# EAGLE board mk-keypad (EAGLE 4.16)
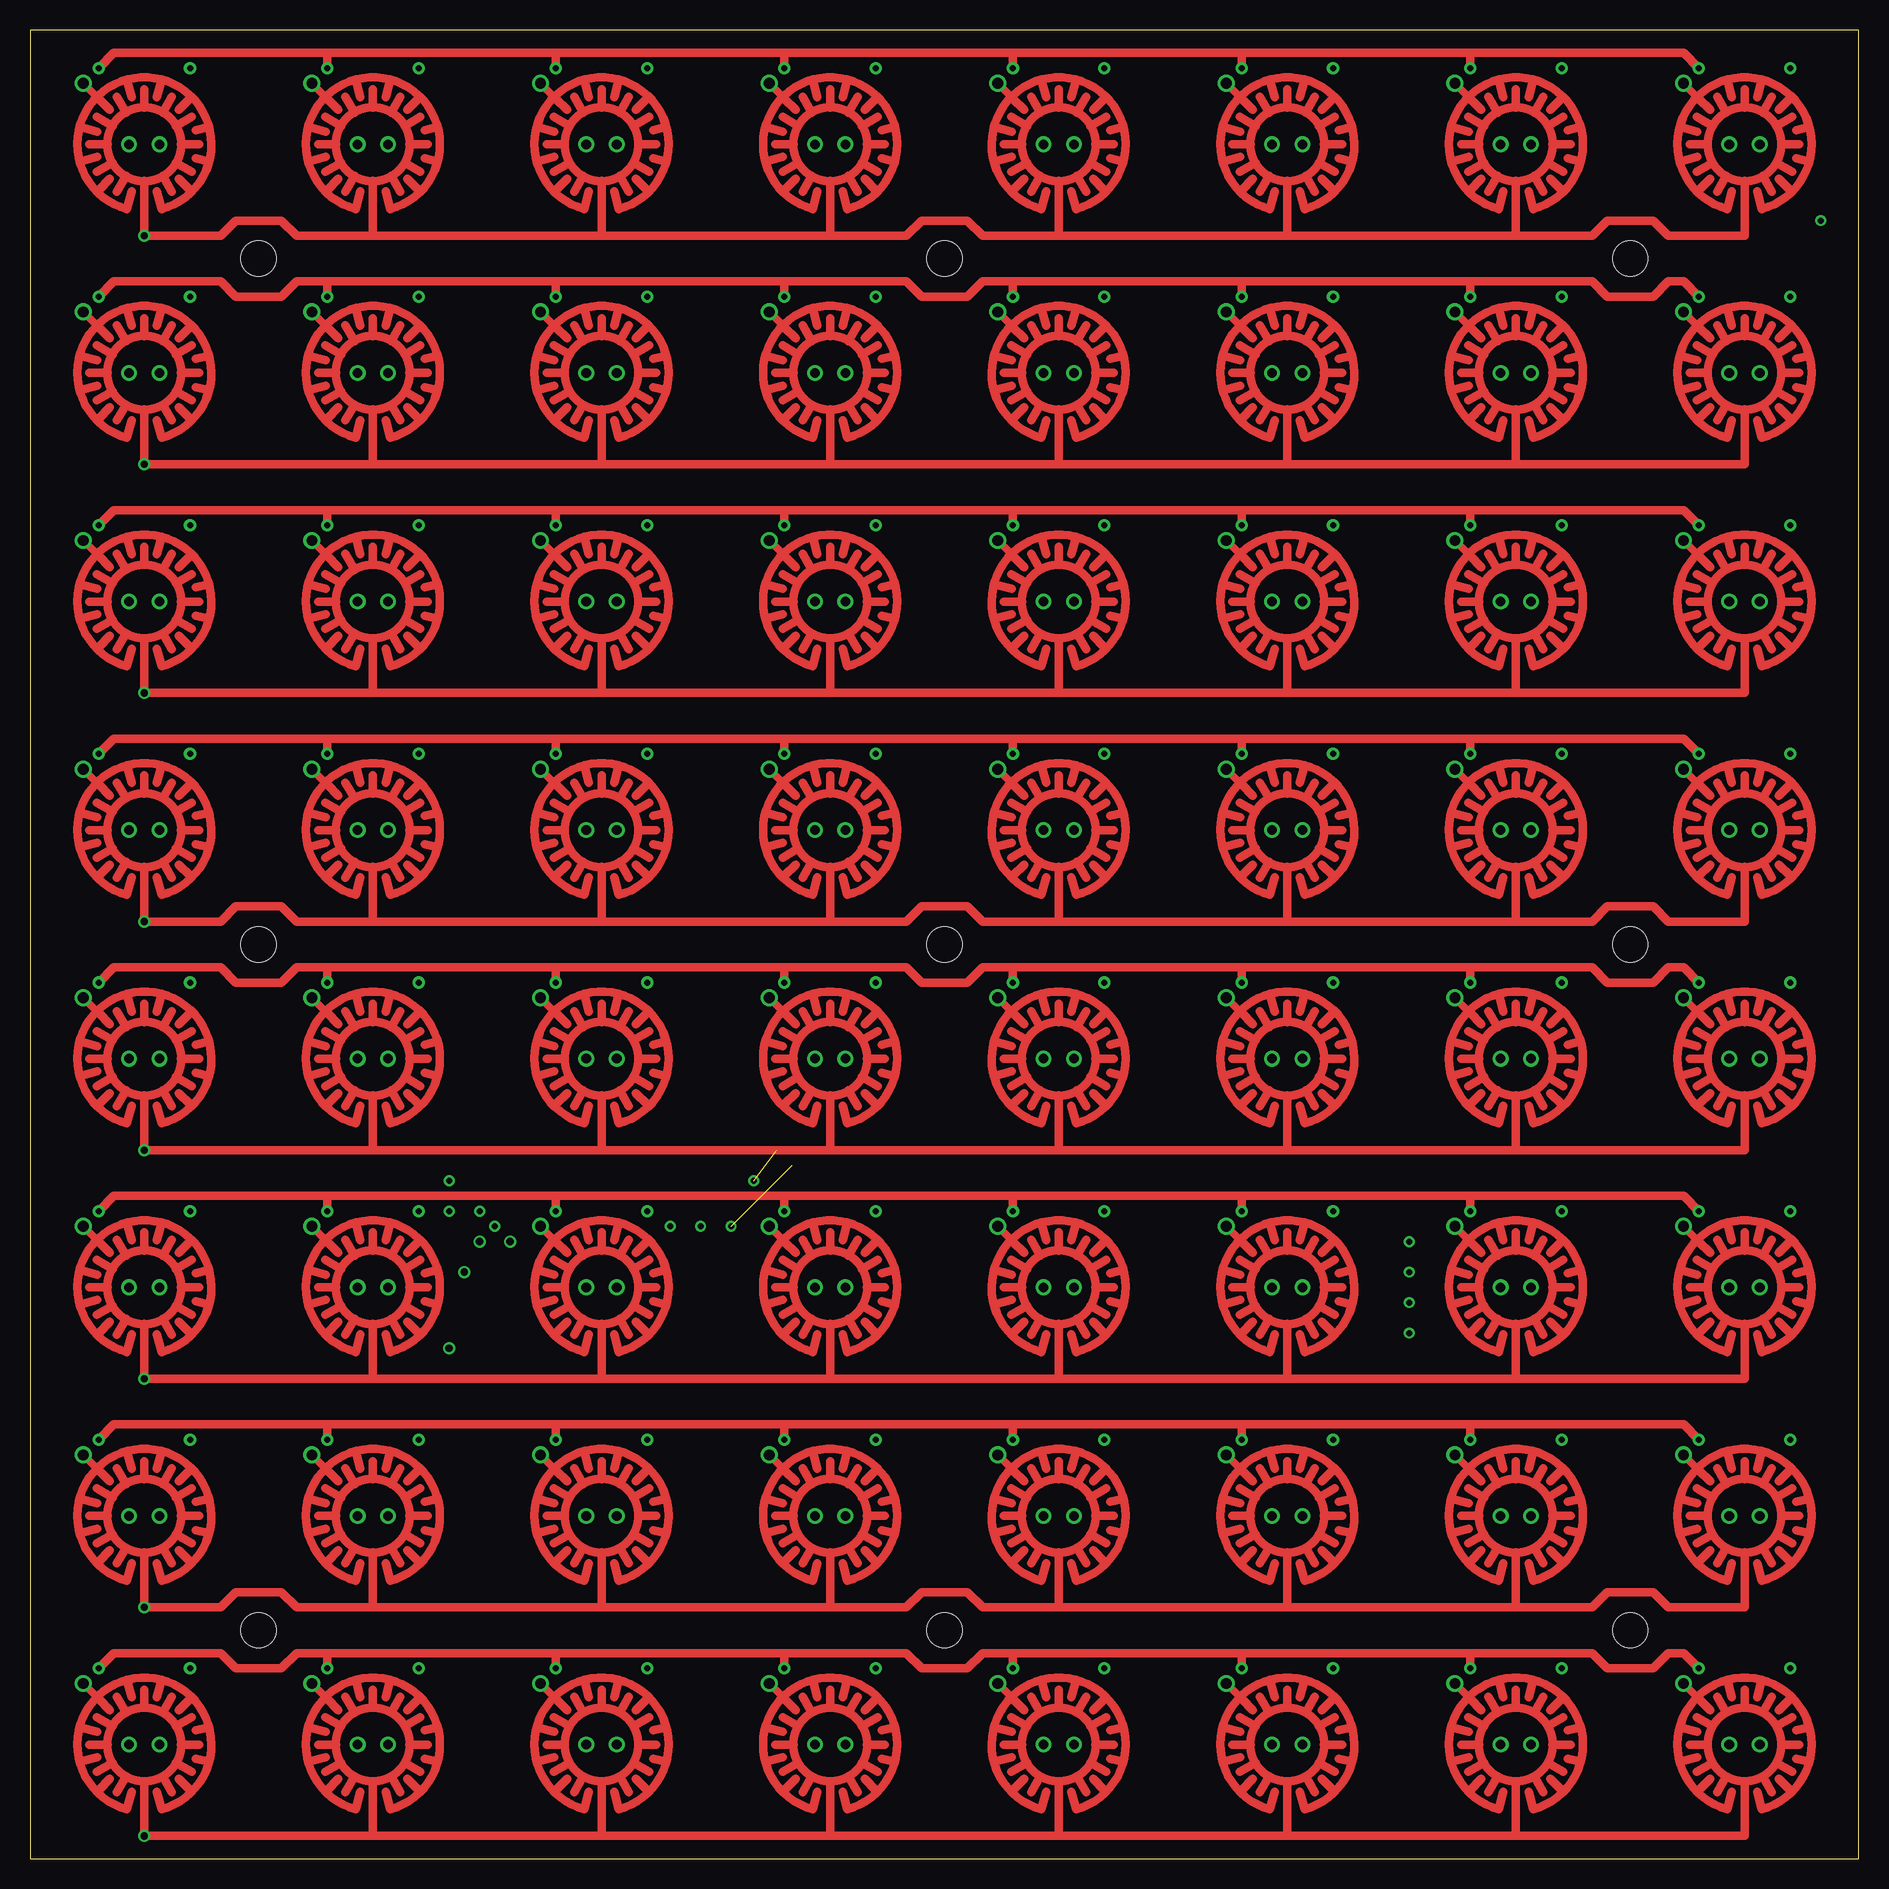
[diagram p0: board, top side]
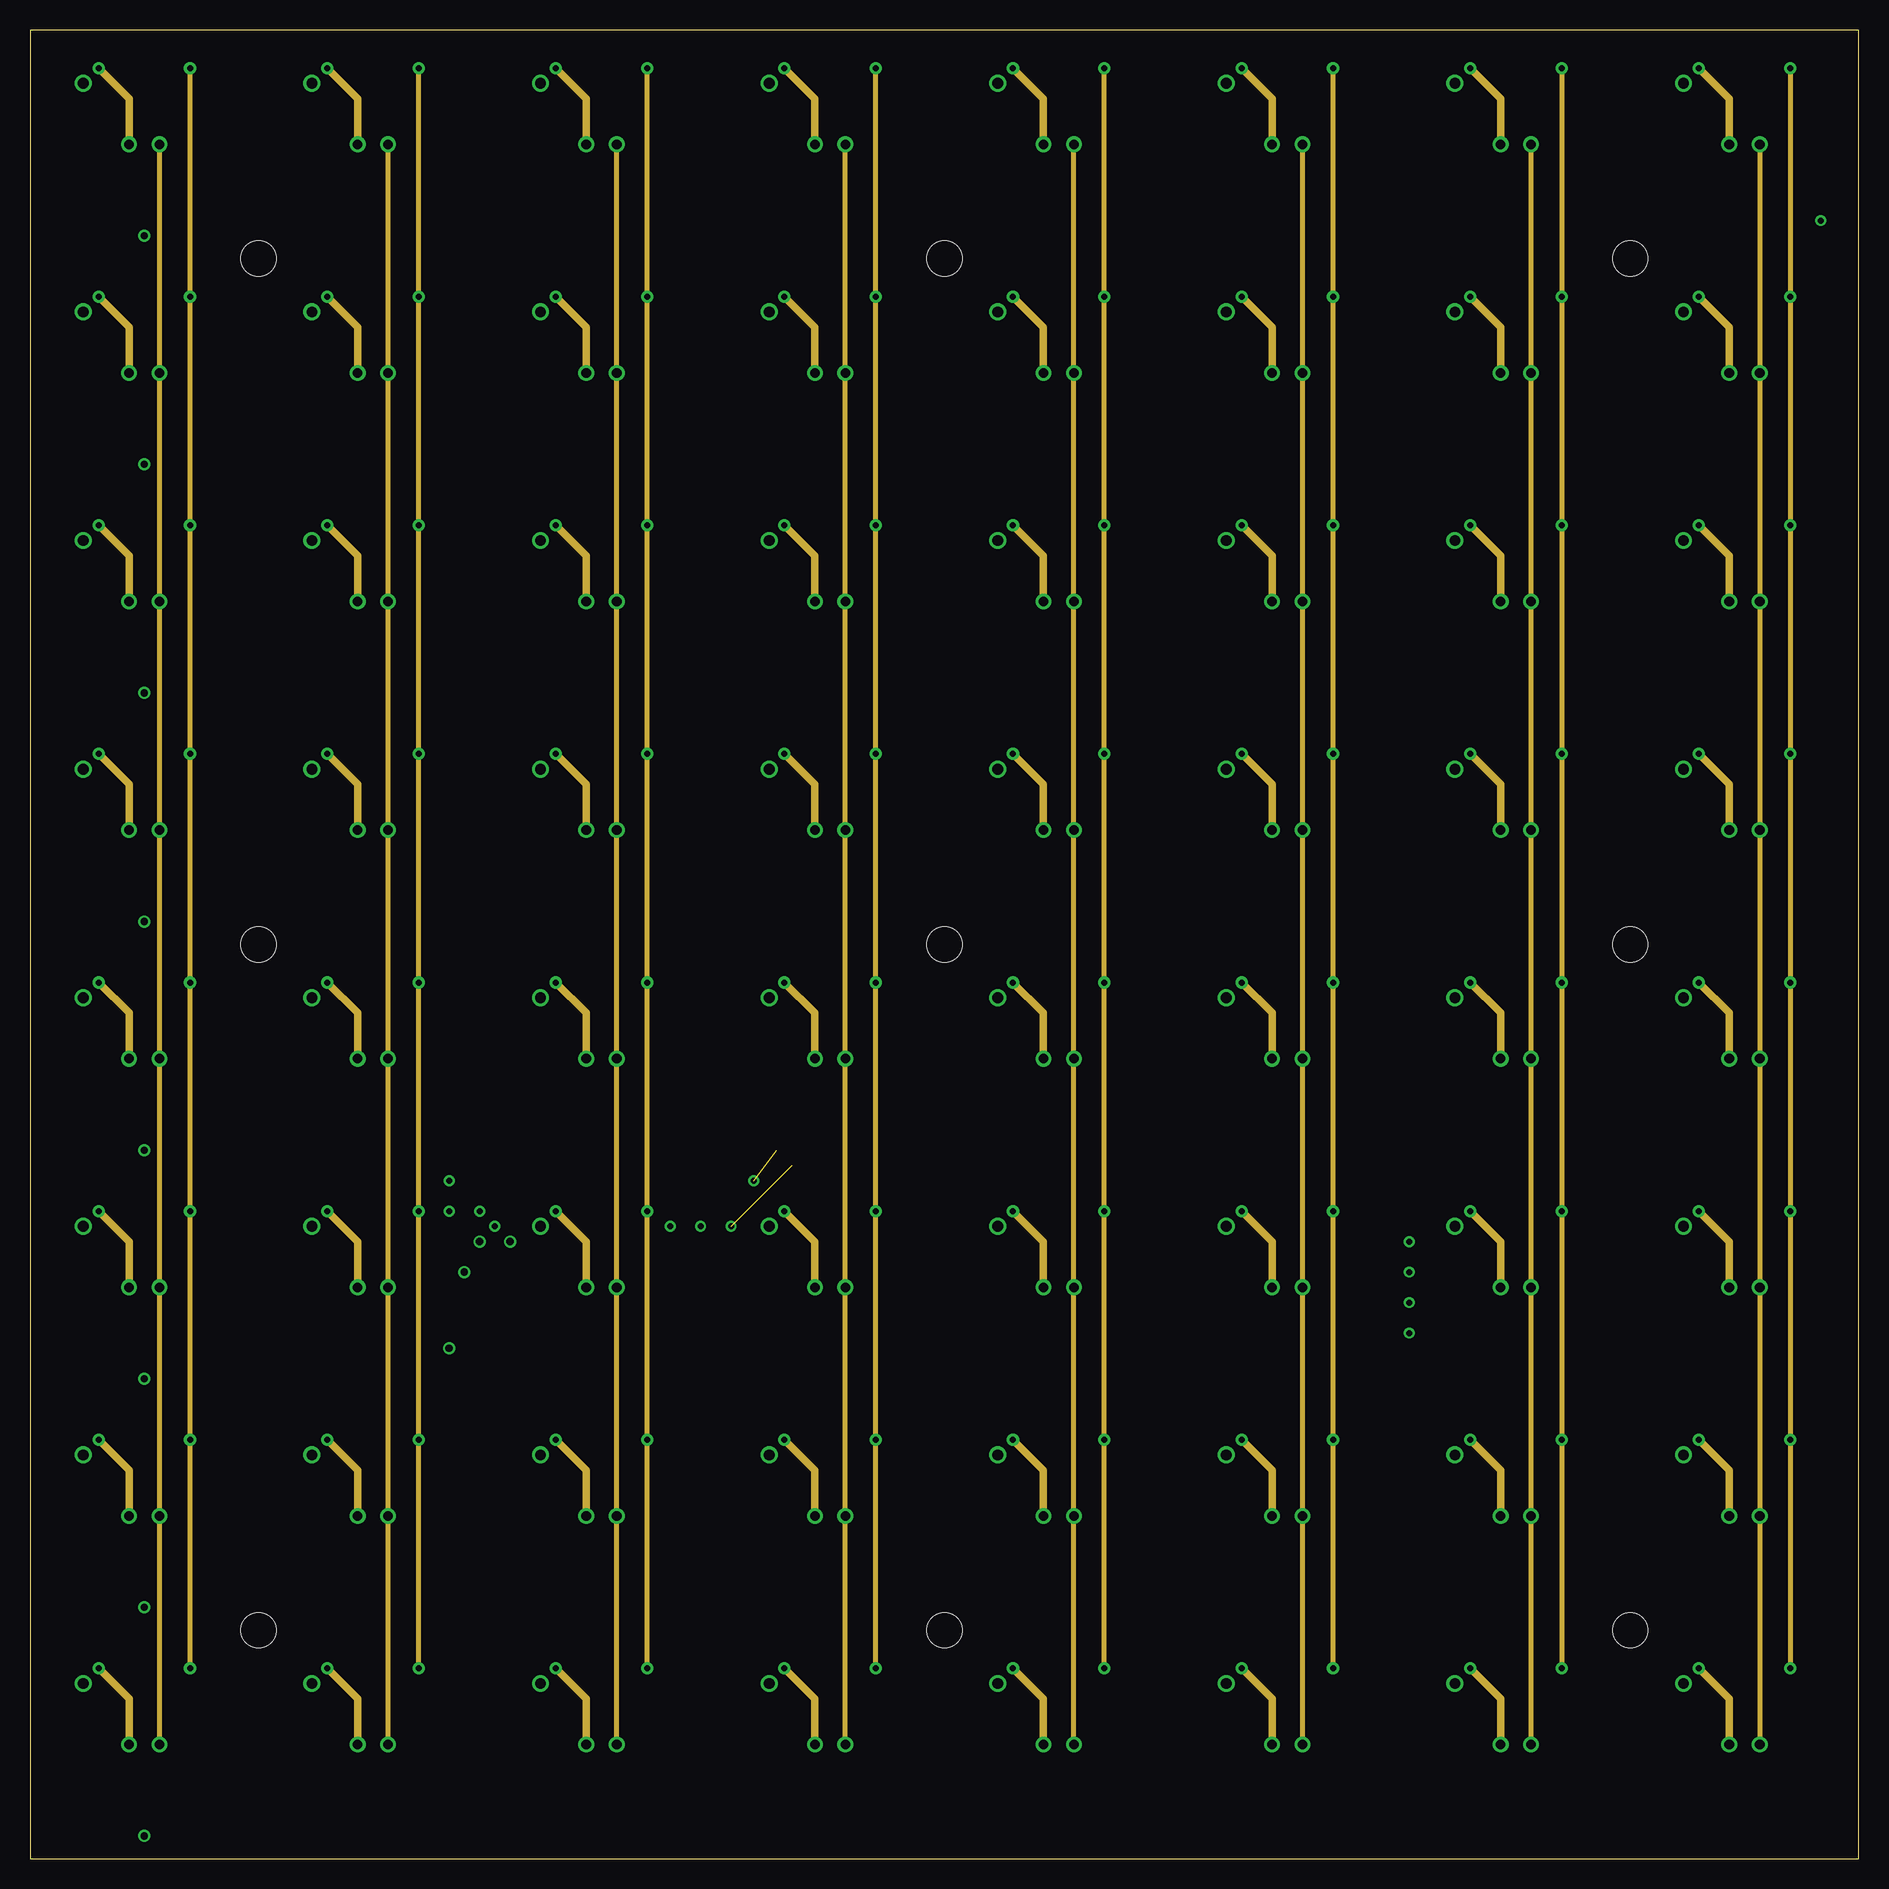
[diagram p1: board, inner layer Route2]
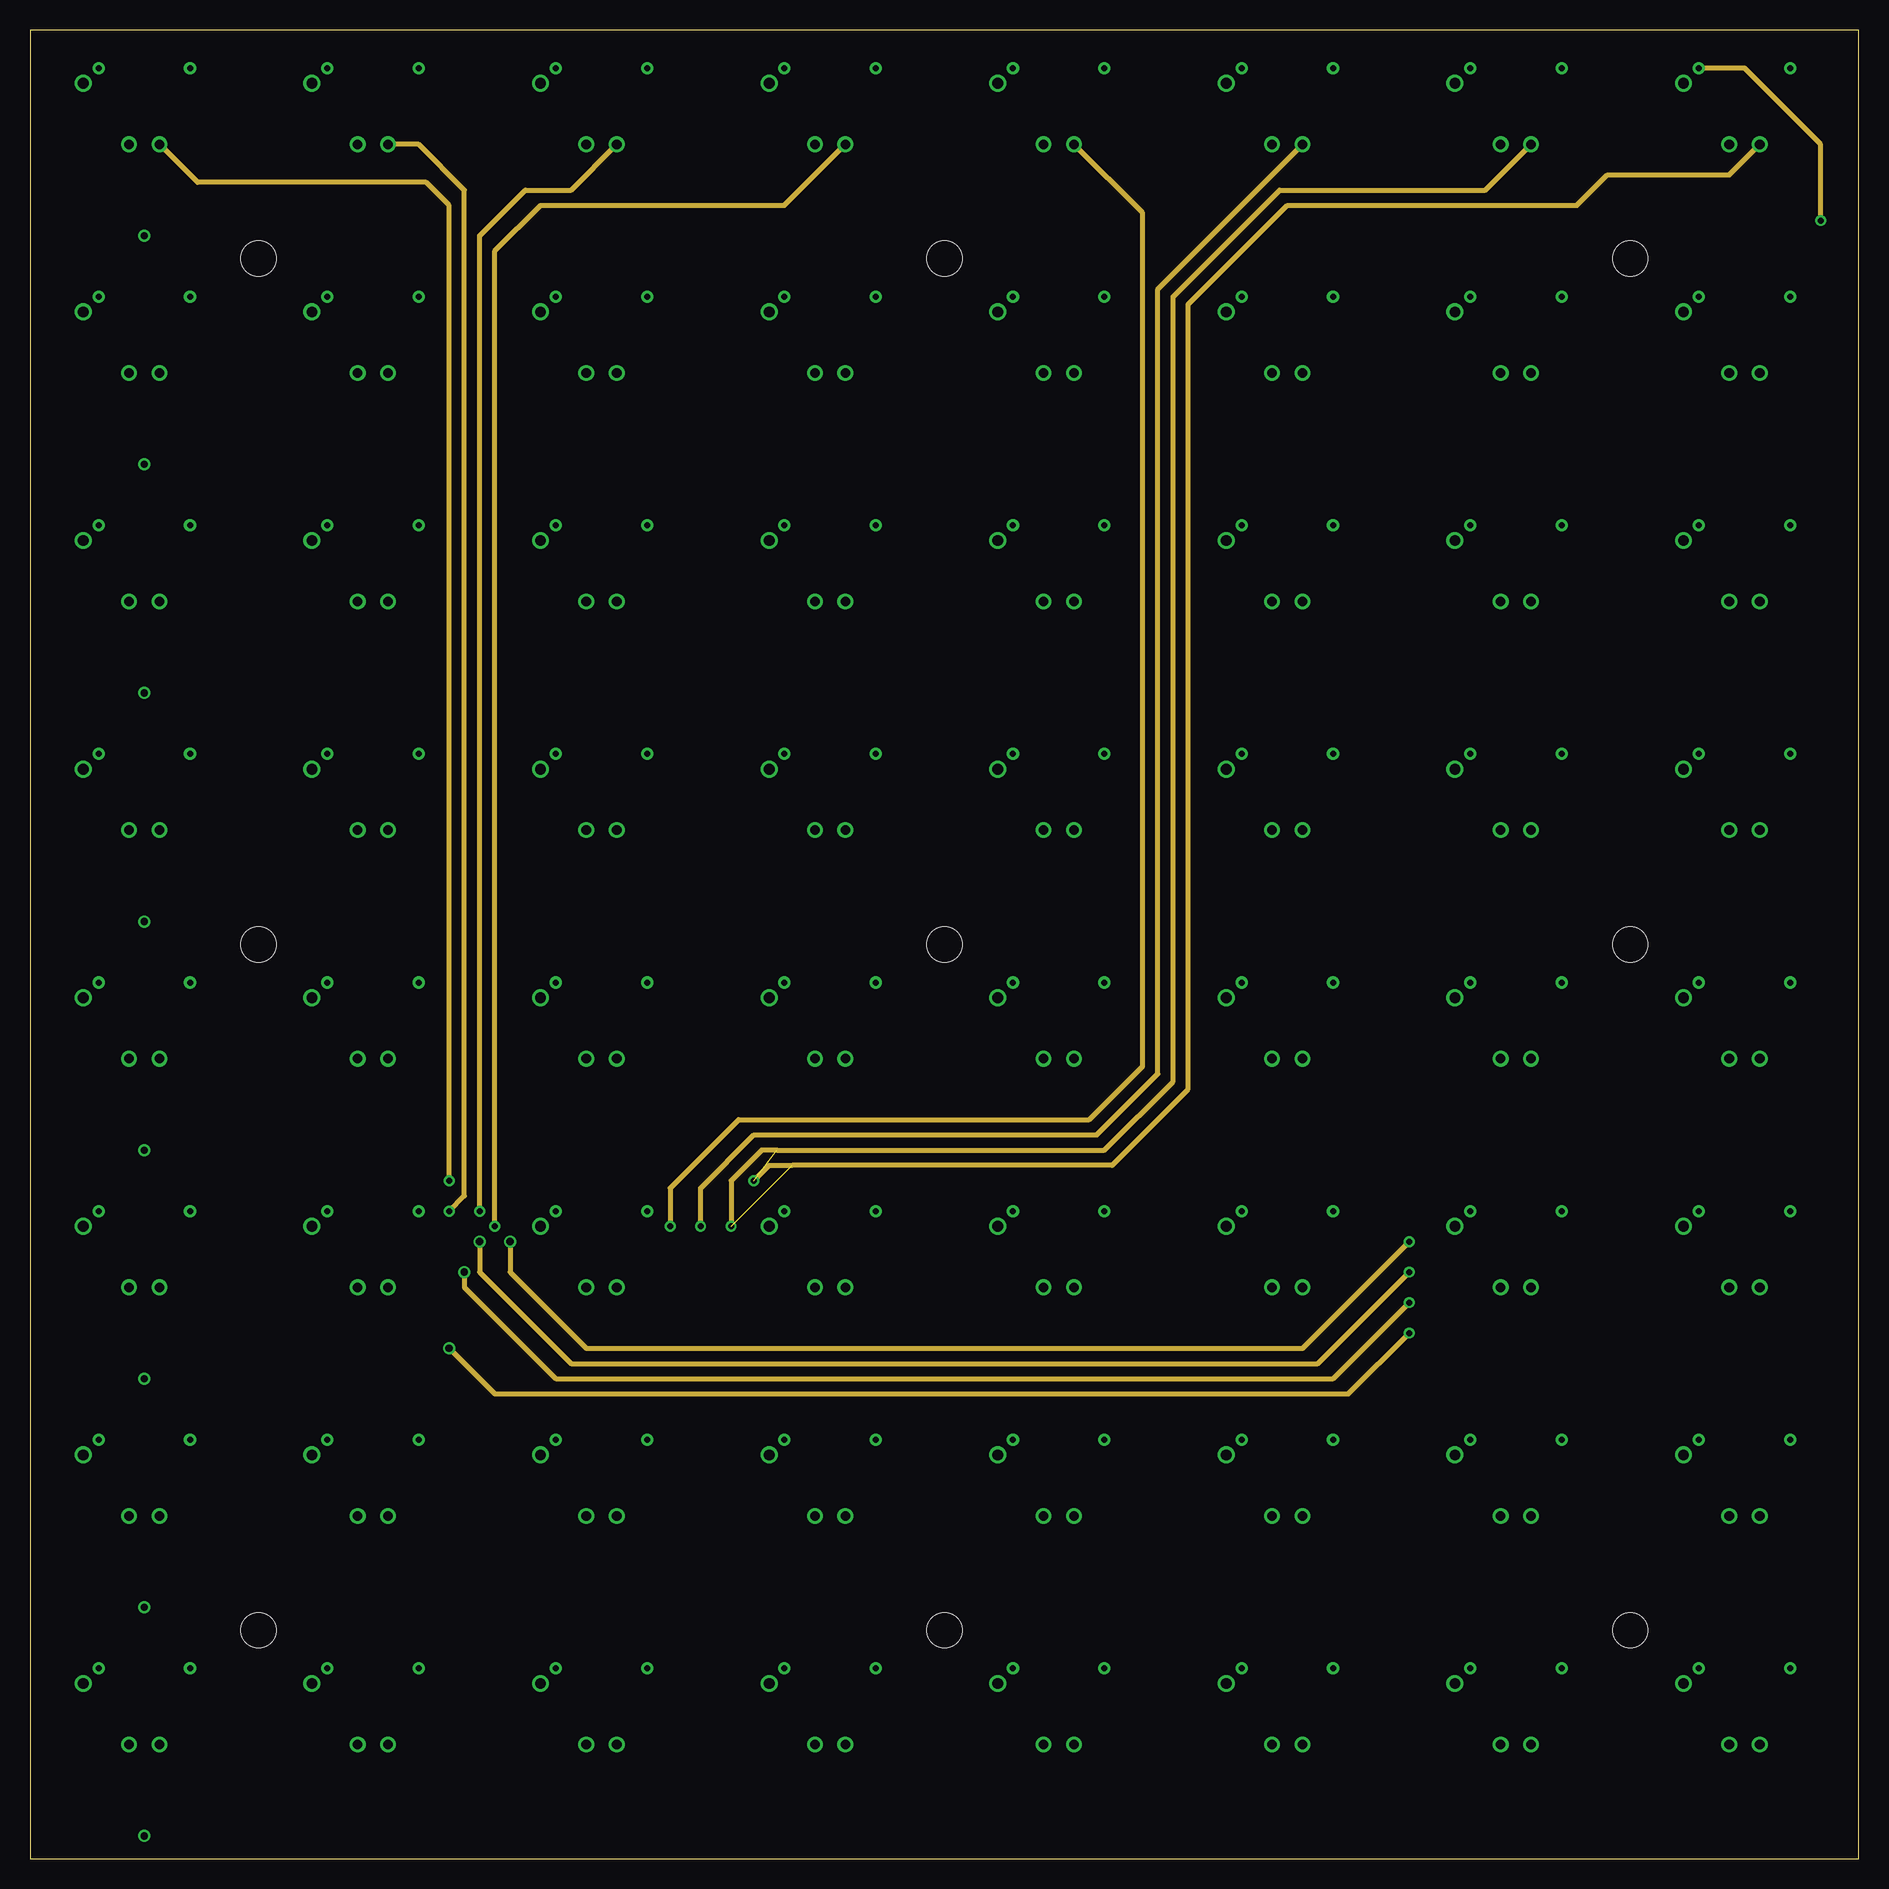
[diagram p2: board, inner layer Route3]
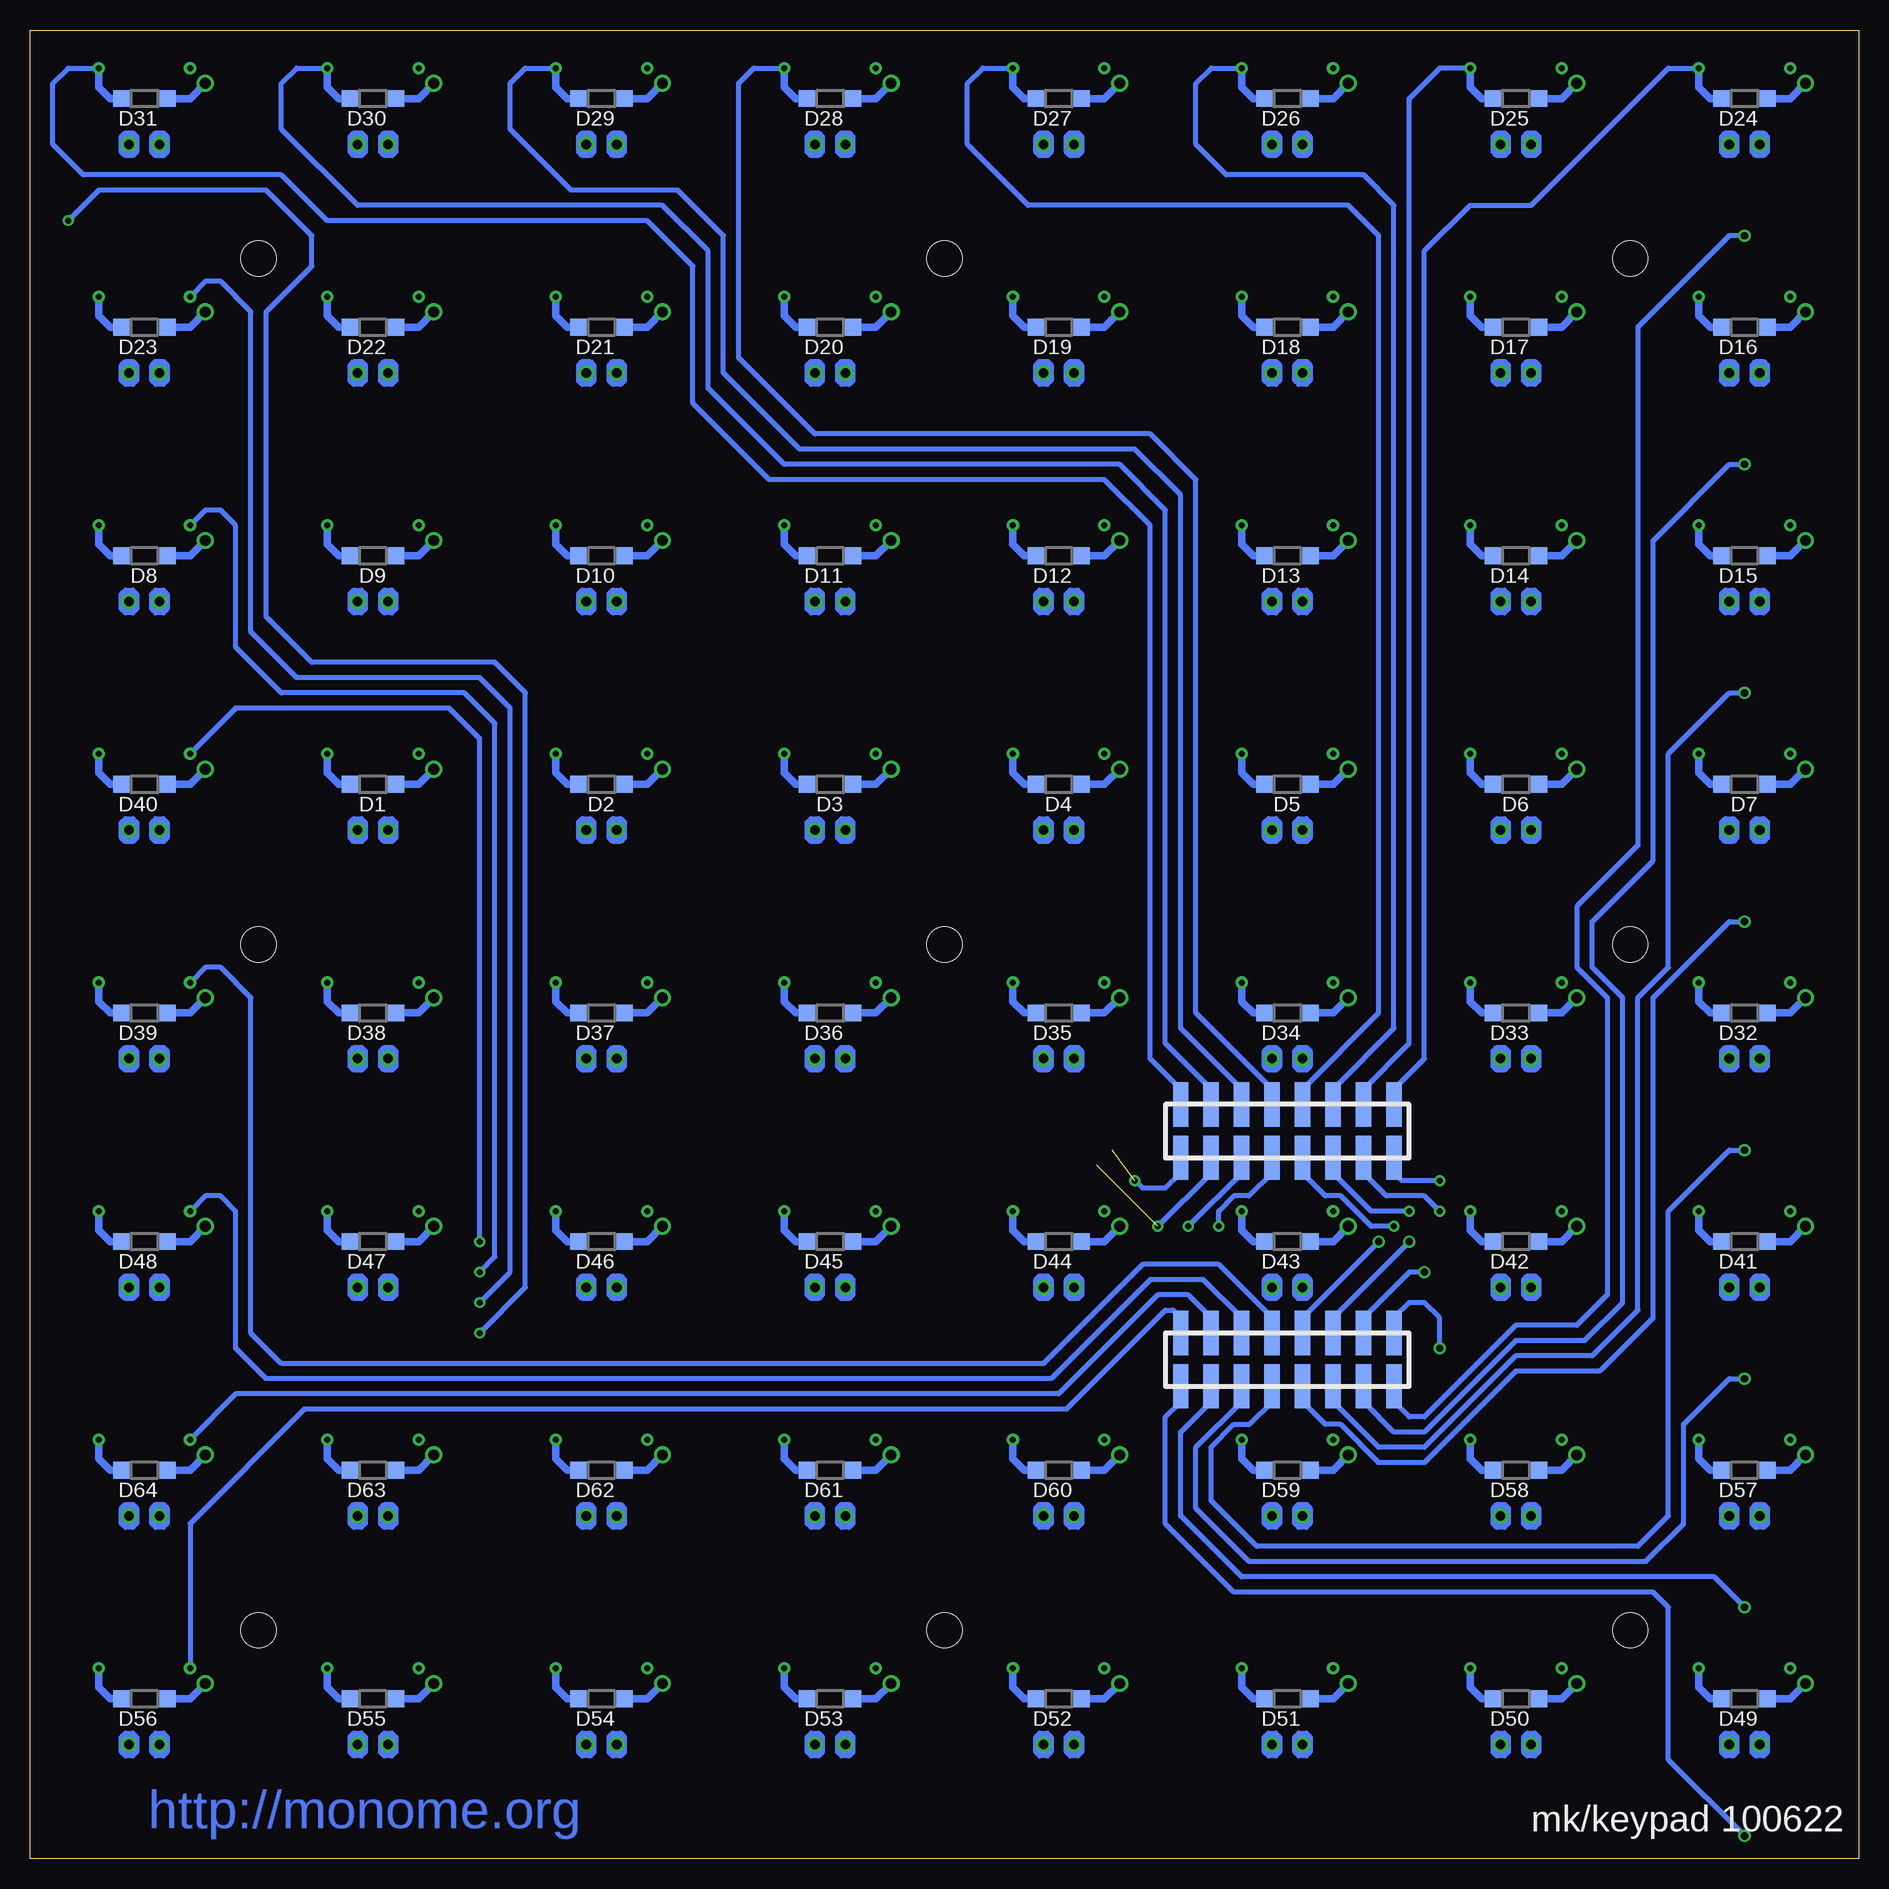
[diagram p3: board, bottom side, seen from below]

Size 152.4 x 152.4 mm. Coordinates in mm from the lower left corner, seen from the top.
Outline: 0,0 152.4,0 152.4,152.4 0,152.4 0,0
Copper layers (1*2*3*16): Top 0.035mm / dielectric 1.5mm / Route2 0.035mm / dielectric 0.15mm / Route3 0.035mm / dielectric 0.2mm / Bottom 0.035mm
Design rules "default": minimum track width 10mil, minimum drill 24mil, track to track 8mil, track to pad 8mil, pad to pad 8mil, via to via 8mil, smd to smd 8mil, copper to edge 40mil, drill to drill 8mil, minimum pad ring 10mil, minimum via ring 8mil, stop-mask expansion 4mil, vias tented up to drill 0mil, thermal gap 10mil
Holes 2.92 mm at 19.05,19.05 76.2,19.05 76.2,76.2 19.05,76.2 133.35,76.2 133.35,19.05 19.05,133.35 76.2,133.35 133.35,133.35

## Footprints (pad centres in the part's own frame; a part is rotated, then mirrored left to right if it is on the bottom)
SOD123 = smd 1.4 x 1.4: A 1.9,0; C -1.9,0
MPAD4 = drill 0.9 round: P$1 -5.08,5.08 | drill 0.5 round: P$2 -3.81,6.35; P$3 3.81,6.35 | drill 0.8 pad 1.016 round: P$4 1.27,0; P$5 -1.27,0
8X2SMD = smd 1.27 x 3.683: P$1 0,0; P$2 2.54,0; P$3 5.08,0; P$4 7.62,0; P$5 10.16,0; P$6 12.7,0; P$7 15.24,0; P$8 17.78,0; P$9 17.78,-4.445; P$10 15.24,-4.445; P$11 12.7,-4.445; P$12 10.16,-4.445; P$13 7.62,-4.445; P$14 5.08,-4.445; P$15 2.54,-4.445; P$16 0,-4.445

## Placement (x,y rotation side)
D1  [SOD123]  123.83,89.54 180 bottom
D2  [SOD123]  104.78,89.54 180 bottom
D3  [SOD123]  85.73,89.54 180 bottom
D4  [SOD123]  66.67,89.54 180 bottom
D5  [SOD123]  47.62,89.54 180 bottom
D6  [SOD123]  28.58,89.54 180 bottom
D7  [SOD123]  9.53,89.54 180 bottom
D8  [SOD123]  142.88,108.59 180 bottom
D9  [SOD123]  123.83,108.59 180 bottom
D10  [SOD123]  104.78,108.59 180 bottom
D11  [SOD123]  85.73,108.59 180 bottom
D12  [SOD123]  66.67,108.59 180 bottom
D13  [SOD123]  47.62,108.59 180 bottom
D14  [SOD123]  28.58,108.59 180 bottom
D15  [SOD123]  9.53,108.59 180 bottom
D16  [SOD123]  9.53,127.64 180 bottom
D17  [SOD123]  28.58,127.64 180 bottom
D18  [SOD123]  47.62,127.64 180 bottom
D19  [SOD123]  66.67,127.64 180 bottom
D20  [SOD123]  85.73,127.64 180 bottom
D21  [SOD123]  104.78,127.64 180 bottom
D22  [SOD123]  123.83,127.64 180 bottom
D23  [SOD123]  142.88,127.64 180 bottom
D24  [SOD123]  9.53,146.69 180 bottom
D25  [SOD123]  28.58,146.69 180 bottom
D26  [SOD123]  47.62,146.69 180 bottom
D27  [SOD123]  66.67,146.69 180 bottom
D28  [SOD123]  85.73,146.69 180 bottom
D29  [SOD123]  104.78,146.69 180 bottom
D30  [SOD123]  123.83,146.69 180 bottom
D31  [SOD123]  142.88,146.69 180 bottom
D32  [SOD123]  9.53,70.48 180 bottom
D33  [SOD123]  28.58,70.48 180 bottom
D34  [SOD123]  47.62,70.48 180 bottom
D35  [SOD123]  66.67,70.48 180 bottom
D36  [SOD123]  85.73,70.48 180 bottom
D37  [SOD123]  104.78,70.48 180 bottom
D38  [SOD123]  123.83,70.48 180 bottom
D39  [SOD123]  142.88,70.48 180 bottom
D40  [SOD123]  142.88,89.54 180 bottom
D41  [SOD123]  9.53,51.43 180 bottom
D42  [SOD123]  28.58,51.43 180 bottom
D43  [SOD123]  47.62,51.43 180 bottom
D44  [SOD123]  66.67,51.43 180 bottom
D45  [SOD123]  85.73,51.43 180 bottom
D46  [SOD123]  104.78,51.43 180 bottom
D47  [SOD123]  123.83,51.43 180 bottom
D48  [SOD123]  142.88,51.43 180 bottom
D49  [SOD123]  9.53,13.34 180 bottom
D50  [SOD123]  28.58,13.34 180 bottom
D51  [SOD123]  47.62,13.34 180 bottom
D52  [SOD123]  66.67,13.34 180 bottom
D53  [SOD123]  85.73,13.34 180 bottom
D54  [SOD123]  104.78,13.34 180 bottom
D55  [SOD123]  123.83,13.34 180 bottom
D56  [SOD123]  142.88,13.34 180 bottom
D57  [SOD123]  9.53,32.38 180 bottom
D58  [SOD123]  28.58,32.38 180 bottom
D59  [SOD123]  47.62,32.38 180 bottom
D60  [SOD123]  66.67,32.38 180 bottom
D61  [SOD123]  85.73,32.38 180 bottom
D62  [SOD123]  104.78,32.38 180 bottom
D63  [SOD123]  123.83,32.38 180 bottom
D64  [SOD123]  142.88,32.38 180 bottom
E$1  [MPAD4]  28.58,142.88 0 top
E$2  [MPAD4]  47.62,142.88 0 top
E$3  [MPAD4]  66.67,142.88 0 top
E$4  [MPAD4]  85.73,142.88 0 top
E$5  [MPAD4]  104.78,142.88 0 top
E$6  [MPAD4]  123.83,142.88 0 top
E$7  [MPAD4]  142.88,142.88 0 top
E$8  [MPAD4]  9.53,123.83 0 top
E$9  [MPAD4]  28.58,123.83 0 top
E$10  [MPAD4]  47.62,123.83 0 top
E$11  [MPAD4]  66.67,123.83 0 top
E$12  [MPAD4]  85.73,123.83 0 top
E$13  [MPAD4]  104.78,123.83 0 top
E$14  [MPAD4]  123.83,123.83 0 top
E$15  [MPAD4]  142.88,123.83 0 top
E$16  [MPAD4]  9.53,104.78 0 top
E$17  [MPAD4]  28.58,104.78 0 top
E$18  [MPAD4]  47.62,104.78 0 top
E$19  [MPAD4]  66.67,104.78 0 top
E$20  [MPAD4]  85.73,104.78 0 top
E$21  [MPAD4]  104.78,104.78 0 top
E$22  [MPAD4]  123.83,104.78 0 top
E$23  [MPAD4]  142.88,104.78 0 top
E$24  [MPAD4]  9.53,85.73 0 top
E$25  [MPAD4]  28.58,85.73 0 top
E$26  [MPAD4]  47.62,85.73 0 top
E$27  [MPAD4]  66.67,85.73 0 top
E$28  [MPAD4]  85.73,85.73 0 top
E$29  [MPAD4]  104.78,85.73 0 top
E$30  [MPAD4]  123.83,85.73 0 top
E$31  [MPAD4]  142.88,85.73 0 top
E$32  [MPAD4]  9.53,66.67 0 top
E$33  [MPAD4]  28.58,66.67 0 top
E$34  [MPAD4]  47.62,66.67 0 top
E$35  [MPAD4]  66.67,66.67 0 top
E$36  [MPAD4]  85.73,66.67 0 top
E$37  [MPAD4]  104.78,66.67 0 top
E$38  [MPAD4]  123.83,66.67 0 top
E$39  [MPAD4]  142.88,66.67 0 top
E$40  [MPAD4]  9.53,47.62 0 top
E$41  [MPAD4]  9.53,142.88 0 top
E$42  [MPAD4]  28.58,47.62 0 top
E$43  [MPAD4]  47.62,47.62 0 top
E$44  [MPAD4]  66.67,47.62 0 top
E$45  [MPAD4]  85.73,47.62 0 top
E$46  [MPAD4]  104.78,47.62 0 top
E$47  [MPAD4]  123.83,47.62 0 top
E$48  [MPAD4]  142.88,47.62 0 top
E$49  [MPAD4]  9.53,28.58 0 top
E$50  [MPAD4]  28.58,28.58 0 top
E$51  [MPAD4]  47.62,28.58 0 top
E$52  [MPAD4]  66.67,28.58 0 top
E$53  [MPAD4]  85.73,28.58 0 top
E$54  [MPAD4]  104.78,28.58 0 top
E$55  [MPAD4]  123.83,28.58 0 top
E$56  [MPAD4]  142.88,28.58 0 top
E$57  [MPAD4]  9.53,9.53 0 top
E$58  [MPAD4]  28.58,9.53 0 top
E$59  [MPAD4]  47.62,9.53 0 top
E$60  [MPAD4]  66.67,9.53 0 top
E$61  [MPAD4]  85.73,9.53 0 top
E$62  [MPAD4]  104.78,9.53 0 top
E$63  [MPAD4]  123.83,9.53 0 top
E$64  [MPAD4]  142.88,9.53 0 top
E$65  [8X2SMD]  56.52,43.81 0 bottom
E$66  [8X2SMD]  56.52,62.87 0 bottom

## Library data of the parts
D1-D64 = diode
E$1-E$66 = monome

## Nets
S$2: E$65.P$1
S$8: E$1.P$2 E$2.P$2 E$3.P$2 E$4.P$2 E$5.P$2 E$6.P$2 E$7.P$2 E$41.P$2
S$10: E$41.P$4 E$57.P$4
S$15: E$8.P$2 E$9.P$2 E$10.P$2 E$11.P$2 E$12.P$2 E$13.P$2 E$14.P$2 E$15.P$2
S$18: E$41.P$3 E$57.P$3
S$19: E$3.P$3
S$34: E$56.P$2
S$35: E$48.P$2 E$65.P$3
S$36: E$39.P$2
S$37: E$64.P$2
S$39: E$23.P$2
S$41: E$31.P$2
S$42: E$5.P$4
S$44: E$1.P$3
S$45: E$2.P$3
S$46: E$4.P$3
S$47: E$5.P$3
S$48: E$6.P$3
S$49: E$7.P$3
S$50: E$2.P$4
S$51: E$3.P$4
S$54: E$1.P$4
S$58: E$4.P$4
S$60: E$6.P$4 E$7.P$4

## Tracks (layer width: path | path; a pad name or v marks a point on that pad's centre or on a via)
S$1  (via drill 0.6)
  Top 0.711: v9.53,135.25 15.88,135.25 17.14,136.53 20.95,136.53 22.23,135.25 73.03,135.25 74.3,136.53 78.11,136.53 79.38,135.25 130.18,135.25 131.44,136.53 135.25,136.53 136.53,135.25 142.88,135.25
  Bottom 0.406: 38.73,38.1 37.47,36.83 36.2,36.83 28.58,44.45 23.5,44.45 20.95,46.99 20.95,71.75 23.5,74.3 23.5,79.38 18.41,84.46 18.41,127.64 10.79,135.25 v9.53,135.25
S$2
  Bottom 0.406: E$65.P$1 56.52,42.55
S$3  (via drill 0.6)
  Top 0.711: v9.53,116.21 142.88,116.21
  Bottom 0.406: 41.27,38.1 38.73,35.56 36.2,35.56 28.58,43.18 22.86,43.18 19.69,46.35 19.69,71.75 22.23,74.3 22.23,78.11 17.14,83.19 17.14,109.86 10.79,116.21 v9.53,116.21
S$4  (via drill 0.6)
  Top 0.711: v9.53,97.16 142.88,97.16
  Bottom 0.406: 43.81,38.1 40.01,34.29 36.2,34.29 28.58,41.91 22.23,41.91 18.41,45.72 18.41,71.75 15.88,74.3 15.88,92.08 10.79,97.16 v9.53,97.16
S$5  (via drill 0.6)
  Top 0.711: v9.53,78.11 15.88,78.11 17.14,79.38 20.95,79.38 22.23,78.11 73.03,78.11 74.3,79.38 78.11,79.38 79.38,78.11 130.18,78.11 131.44,79.38 135.25,79.38 136.53,78.11 142.88,78.11
  Bottom 0.406: 46.35,38.1 44.45,36.2 43.18,36.2 40.01,33.02 36.2,33.02 28.58,40.64 21.59,40.64 17.14,45.09 17.14,71.75 10.79,78.11 v9.53,78.11
S$6  (via drill 0.6)
  Top 0.711: v9.53,59.05 142.88,59.05
  Bottom 0.406: 48.89,38.1 50.8,36.2 52.07,36.2 53.98,34.29 53.98,29.84 50.16,26.04 18.41,26.04 15.88,28.58 15.88,53.98 10.79,59.05 v9.53,59.05
S$7  (via drill 0.6)
  Top 0.711: v9.53,40.01 142.88,40.01
  Bottom 0.406: 51.43,38.1 55.24,34.29 55.24,29.21 50.8,24.77 17.78,24.77 14.61,27.94 14.61,36.2 10.79,40.01 v9.53,40.01
S$8  (via drill 0.5, 0.6)
  Top 0.711: E$41.P$2 6.99,150.5 24.77,150.5 | 24.77,150.5 E$1.P$2 | 43.81,150.5 24.77,150.5 | 43.81,150.5 E$2.P$2 | 62.87,150.5 43.81,150.5 | 62.87,150.5 E$3.P$2 | 81.92,150.5 62.87,150.5 | 81.92,150.5 E$4.P$2 | 100.97,150.5 81.92,150.5 | 100.97,150.5 E$5.P$2 | 120.02,150.5 100.97,150.5 | 120.02,150.5 E$6.P$2 | 120.02,150.5 137.8,150.5 E$7.P$2
  Route3 0.406: v34.92,42.55 38.73,38.73 109.86,38.73 v114.94,43.81 | v149.22,136.53 149.22,142.88 142.88,149.22 E$7.P$2
  Bottom 0.406: v149.22,136.53 146.69,139.06 132.72,139.06 128.91,135.25 128.91,132.72 132.72,128.91 132.72,103.51 128.91,99.7 113.67,99.7 111.12,97.16 111.12,47.62 v114.94,43.81 | 38.73,45.09 37.47,46.35 36.2,46.35 34.92,45.09 v34.92,42.55
S$9  (via drill 0.6)
  Top 0.711: v9.53,1.91 142.88,1.91
  Bottom 0.406: v9.53,1.91 15.88,8.26 15.88,20.95 17.14,22.23 52.07,22.23 57.78,27.94 57.78,36.83 56.52,38.1
S$10  (via drill 0.5)
  Route2 0.406: E$57.P$4 E$41.P$4
  Route3 0.406: v34.92,56.52 34.92,137.8 33.02,139.7 13.97,139.7 E$41.P$4
  Bottom 0.406: 38.73,57.15 38.1,56.52 v34.92,56.52
S$11
  Top 0.711: 5.71,111.12 6.99,112.4 24.77,112.4 | 24.77,112.4 43.81,112.4 | 43.81,112.4 62.87,112.4 | 62.87,112.4 81.92,112.4 | 81.92,112.4 100.97,112.4 | 100.97,112.4 120.02,112.4 | 120.02,112.4 137.8,112.4 139.06,111.12 | 120.02,112.4 120.02,111.12 | 100.97,112.4 100.97,111.12 | 81.92,112.4 81.92,111.12 | 62.87,112.4 62.87,111.12 | 43.81,112.4 43.81,111.12 | 24.77,112.4 24.77,111.12
S$12
  Top 0.711: 5.71,92.08 6.99,93.34 24.77,93.34 | 24.77,93.34 43.81,93.34 | 43.81,93.34 62.87,93.34 | 62.87,93.34 81.92,93.34 | 81.92,93.34 100.97,93.34 | 100.97,93.34 120.02,93.34 | 120.02,93.34 137.8,93.34 139.06,92.08 | 120.02,93.34 120.02,92.08 | 100.97,93.34 100.97,92.08 | 81.92,93.34 81.92,92.08 | 62.87,93.34 62.87,92.08 | 43.81,93.34 43.81,92.08 | 24.77,93.34 24.77,92.08
S$13
  Top 0.711: 5.71,53.98 6.99,55.24 24.77,55.24 | 24.77,55.24 43.81,55.24 | 43.81,55.24 62.87,55.24 | 62.87,55.24 81.92,55.24 | 81.92,55.24 100.97,55.24 | 100.97,55.24 120.02,55.24 | 120.02,55.24 137.8,55.24 139.06,53.98 | 120.02,55.24 120.02,53.98 | 100.97,55.24 100.97,53.98 | 81.92,55.24 81.92,53.98 | 62.87,55.24 62.87,53.98 | 43.81,55.24 43.81,53.98 | 24.77,55.24 24.77,53.98
S$14
  Top 0.711: 5.71,34.92 6.99,36.2 24.77,36.2 | 24.77,36.2 43.81,36.2 | 43.81,36.2 62.87,36.2 | 62.87,36.2 81.92,36.2 | 81.92,36.2 100.97,36.2 | 100.97,36.2 120.02,36.2 | 120.02,36.2 137.8,36.2 139.06,34.92 | 120.02,36.2 120.02,34.92 | 100.97,36.2 100.97,34.92 | 81.92,36.2 81.92,34.92 | 62.87,36.2 62.87,34.92 | 43.81,36.2 43.81,34.92 | 24.77,36.2 24.77,34.92
S$15  (via drill 0.5, 0.6)
  Top 0.711: E$15.P$2 137.8,131.44 136.53,131.44 135.25,130.18 131.44,130.18 130.18,131.44 120.02,131.44 | 120.02,131.44 E$14.P$2 | 100.97,131.44 120.02,131.44 | 100.97,131.44 E$13.P$2 | 81.92,131.44 100.97,131.44 | 81.92,131.44 E$12.P$2 | 81.92,131.44 79.38,131.44 78.11,130.18 74.3,130.18 73.03,131.44 62.87,131.44 | 62.87,131.44 E$11.P$2 | 43.81,131.44 62.87,131.44 | 43.81,131.44 E$10.P$2 | 24.77,131.44 43.81,131.44 | 24.77,131.44 E$9.P$2 | 24.77,131.44 22.23,131.44 20.95,130.18 17.14,130.18 15.88,131.44 6.99,131.44 E$8.P$2
  Route3 0.406: v36.2,48.89 36.2,47.62 43.81,40.01 108.59,40.01 v114.94,46.35
  Bottom 0.406: 41.27,45.09 37.47,48.89 v36.2,48.89 | v114.94,46.35 112.4,48.89 112.4,95.89 114.94,98.43 130.18,98.43 133.98,102.23 133.98,128.91 136.53,131.44 137.8,131.44 E$15.P$2
S$16
  Top 0.711: 5.71,73.03 6.99,74.3 15.88,74.3 17.14,73.03 20.95,73.03 22.23,74.3 24.77,74.3 | 24.77,74.3 43.81,74.3 | 43.81,74.3 62.87,74.3 | 62.87,74.3 73.03,74.3 74.3,73.03 78.11,73.03 79.38,74.3 81.92,74.3 | 81.92,74.3 100.97,74.3 | 100.97,74.3 120.02,74.3 | 120.02,74.3 130.18,74.3 131.44,73.03 135.25,73.03 136.53,74.3 137.8,74.3 139.06,73.03 | 120.02,74.3 120.02,73.03 | 100.97,74.3 100.97,73.03 | 81.92,74.3 81.92,73.03 | 62.87,74.3 62.87,73.03 | 43.81,74.3 43.81,73.03 | 24.77,74.3 24.77,73.03
S$17
  Top 0.711: 5.71,15.88 6.99,17.14 15.88,17.14 17.14,15.88 20.95,15.88 22.23,17.14 24.77,17.14 | 24.77,17.14 43.81,17.14 | 43.81,17.14 62.87,17.14 | 62.87,17.14 73.03,17.14 74.3,15.88 78.11,15.88 79.38,17.14 81.92,17.14 | 81.92,17.14 100.97,17.14 | 100.97,17.14 120.02,17.14 | 120.02,17.14 130.18,17.14 131.44,15.88 135.25,15.88 136.53,17.14 137.8,17.14 139.06,15.88 | 120.02,17.14 120.02,15.88 | 100.97,17.14 100.97,15.88 | 81.92,17.14 81.92,15.88 | 62.87,17.14 62.87,15.88 | 43.81,17.14 43.81,15.88 | 24.77,17.14 24.77,15.88
S$18
  Route2 0.406: E$57.P$3 E$41.P$3
  Bottom 0.406: 38.73,64.14 36.2,66.67 36.2,133.98 32.38,137.8 27.3,137.8 15.88,149.22 E$41.P$3
S$19
  Bottom 0.406: 46.35,64.14 40.01,70.48 40.01,135.25 42.55,137.8 69.22,137.8 74.3,142.88 74.3,147.96 73.03,149.22 E$3.P$3
S$20
  Route2 0.406: 32.38,15.88 32.38,149.22
S$21
  Route2 0.406: 29.84,9.53 29.84,142.88
S$22
  Route2 0.406: 51.43,15.88 51.43,149.22
S$23
  Route2 0.406: 48.89,9.53 48.89,142.88
S$24
  Route2 0.406: 70.48,15.88 70.48,149.22
S$25
  Route2 0.406: 67.95,9.53 67.95,142.88
S$26
  Route2 0.406: 89.54,15.88 89.54,149.22
S$27
  Route2 0.406: 87,9.53 87,142.88
S$28
  Route2 0.406: 108.59,15.88 108.59,149.22
S$29
  Route2 0.406: 106.05,9.53 106.05,142.88
S$30
  Route2 0.406: 127.64,149.22 127.64,15.88
S$31
  Route2 0.406: 125.09,9.53 125.09,142.88
S$32
  Route2 0.406: 146.69,149.22 146.69,15.88
S$33
  Route2 0.406: 144.15,142.88 144.15,9.53
S$34
  Bottom 0.406: 53.98,45.09 55.88,46.99 58.42,46.99 66.67,38.73 135.25,38.73 E$56.P$2
S$35
  Bottom 0.406: E$65.P$3 51.43,45.09 54.61,48.26 59.05,48.26 67.31,40.01 132.72,40.01 135.25,42.55 135.25,53.98 136.53,55.24 137.8,55.24 E$48.P$2
S$36
  Bottom 0.406: 48.89,45.09 53.34,49.53 59.69,49.53 67.95,41.27 131.44,41.27 133.98,43.81 133.98,71.75 136.53,74.3 137.8,74.3 E$39.P$2
S$37
  Bottom 0.406: 56.52,45.09 57.15,45.72 57.78,45.72 66.04,37.47 129.54,37.47 139.06,27.94 E$64.P$2
S$39  (via drill 0.5, 0.6)
  Route3 0.406: v37.47,51.43 37.47,48.89 45.09,41.27 107.32,41.27 v114.94,48.89
  Bottom 0.406: v37.47,51.43 43.81,45.09 | v114.94,48.89 113.67,50.16 113.67,94.62 116.21,97.16 131.44,97.16 135.25,100.97 135.25,111.12 136.53,112.4 137.8,112.4 E$23.P$2
S$40  (via drill 0.6)
  Top 0.711: v9.53,20.95 15.88,20.95 17.14,22.23 20.95,22.23 22.23,20.95 73.03,20.95 74.3,22.23 78.11,22.23 79.38,20.95 130.18,20.95 131.44,22.23 135.25,22.23 136.53,20.95 142.88,20.95
  Bottom 0.406: 53.98,38.1 56.52,35.56 56.52,28.58 51.43,23.5 12.07,23.5 v9.53,20.95
S$41  (via drill 0.5, 0.6)
  Route3 0.406: v40.01,51.43 40.01,48.89 46.35,42.55 106.05,42.55 v114.94,51.43
  Bottom 0.406: v40.01,51.43 46.35,45.09 | v114.94,51.43 114.94,93.34 117.48,95.89 135.25,95.89 E$31.P$2
S$42  (via drill 0.5)
  Route3 0.406: v55.88,52.7 55.88,55.88 60.32,60.32 88.9,60.32 93.98,65.41 93.98,130.81 E$5.P$4
  Bottom 0.406: 51.43,57.15 v55.88,52.7
S$44
  Bottom 0.406: E$1.P$3 34.92,149.22 37.47,146.69 37.47,67.95 41.27,64.14
S$45
  Bottom 0.406: 43.81,64.14 38.73,69.22 38.73,137.8 41.27,140.34 52.7,140.34 55.24,142.88 55.24,147.96 53.98,149.22 E$2.P$3
S$46
  Bottom 0.406: 48.89,64.14 55.24,70.48 55.24,114.94 59.05,118.75 87,118.75 93.34,125.09 93.34,147.96 92.08,149.22 E$4.P$3
S$47
  Bottom 0.406: 51.43,64.14 56.52,69.22 56.52,113.67 60.32,117.48 88.27,117.48 94.62,123.83 94.62,135.25 98.43,139.06 107.32,139.06 112.4,144.15 112.4,147.96 111.12,149.22 E$5.P$3
S$48
  Bottom 0.406: 53.98,64.14 57.78,67.95 57.78,112.4 61.59,116.21 89.54,116.21 95.89,122.56 95.89,133.98 99.7,137.8 125.09,137.8 131.44,144.15 131.44,147.96 130.18,149.22 E$6.P$3
S$49
  Bottom 0.406: 56.52,64.14 59.05,66.67 59.05,111.12 62.87,114.94 90.81,114.94 97.16,121.29 97.16,132.72 100.97,136.53 127.64,136.53 131.44,140.34 147.96,140.34 150.5,142.88 150.5,147.96 149.22,149.22 E$7.P$3
S$50  (via drill 0.5)
  Route3 0.406: v37.47,53.98 37.47,135.25 41.27,139.06 45.09,139.06 E$2.P$4
  Bottom 0.406: 43.81,57.78 43.81,57.15 40.64,53.98 v37.47,53.98
S$51  (via drill 0.5)
  Route3 0.406: v38.73,52.7 38.73,133.98 42.55,137.8 62.87,137.8 E$3.P$4
  Bottom 0.406: 46.35,57.15 44.45,55.24 43.18,55.24 40.64,52.7 v38.73,52.7
S$54  (via drill 0.5)
  Route3 0.406: v34.92,53.98 36.2,55.24 36.2,139.06 32.38,142.88 E$1.P$4
  Bottom 0.406: 41.27,57.15 39.37,55.24 36.2,55.24 v34.92,53.98
S$57
  Bottom 0.406: 56.52,57.15 57.78,55.88 59.69,55.88 60.32,56.52
S$58  (via drill 0.5)
  Route3 0.406: v53.34,52.7 53.34,55.88 59.05,61.59 88.27,61.59 92.71,66.04 92.71,137.16 E$4.P$4
  Bottom 0.406: 48.89,57.15 50.8,55.24 52.07,55.24 53.34,53.98 v53.34,52.7
S$60  (via drill 0.5)  (2 unrouted)
  Route3 0.406: E$7.P$4 141.61,140.34 131.44,140.34 128.91,137.8 104.78,137.8 96.52,129.54 96.52,64.14 90.17,57.78 63.5,57.78 61.59,57.78 v60.32,56.52 | E$6.P$4 121.29,139.06 104.14,139.06 95.25,130.18 95.25,64.77 89.54,59.05 62.23,59.05 60.96,59.05 58.42,56.52 v58.42,52.7
  Bottom 0.406: v58.42,52.7 53.98,57.15

## Text on the board
Bottom: http://monome.org
bPlace: mk/keypad 100622